# EAGLE board Base Station 1.7 (EAGLE 7.3.0)
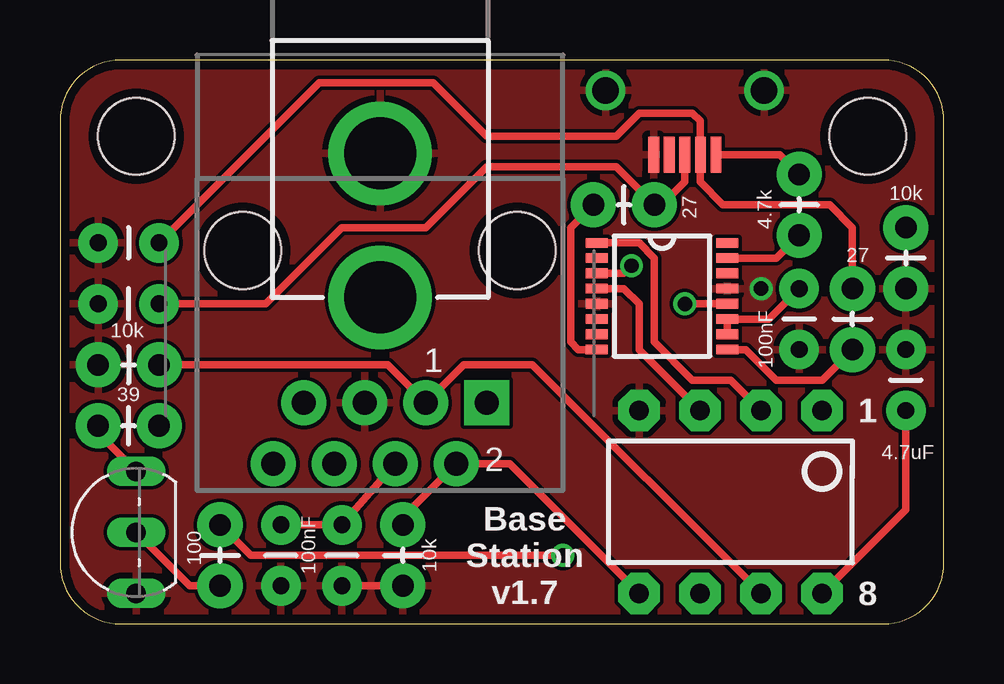
[diagram p0: board, top side]
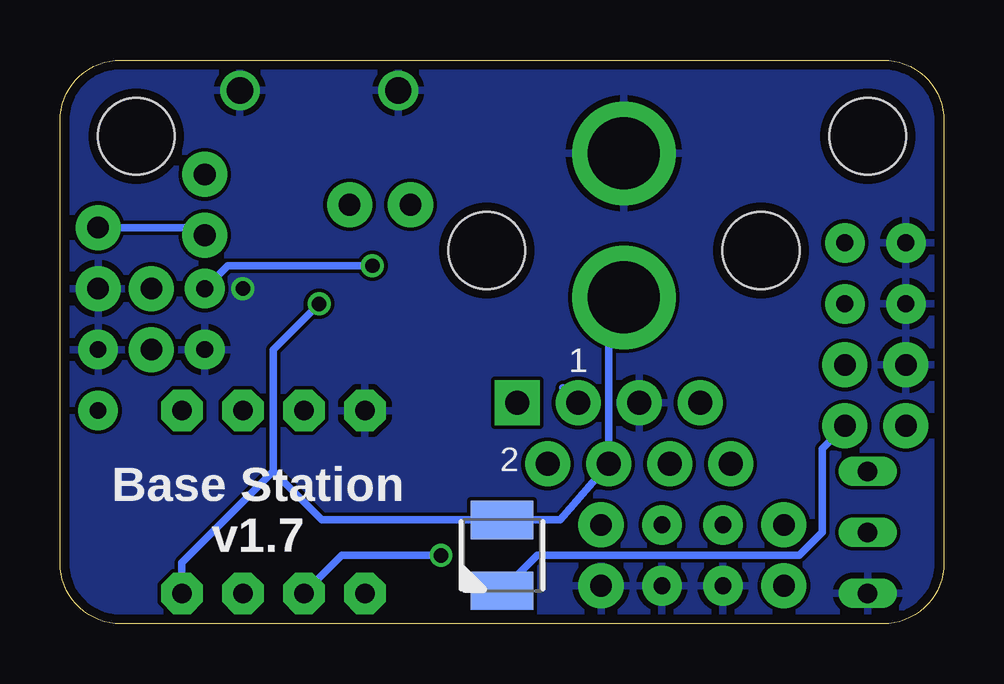
[diagram p1: board, bottom side, seen from below]

Size 36.83 x 23.5 mm. Coordinates in mm from the lower left corner, seen from the top.
Outline: 2.54,0 34.29,0 arc90 36.83,2.54 36.83,20.95 arc90 34.29,23.5 2.54,23.5 arc90 0,20.95 0,2.54 arc90 2.54,0
Copper layers (1*16): Top 0.0356mm / dielectric 1.5011mm / Bottom 0.0356mm
Design rules "LaenPCBOrder": minimum track width 6mil, minimum drill 13mil, track to track 6mil, track to pad 6mil, pad to pad 6mil, via to via 6mil, smd to smd 6mil, copper to edge 15mil, drill to drill 6mil, minimum pad ring 7mil, minimum via ring 7mil, stop-mask expansion 3mil, vias tented up to drill 0mil, thermal gap 10mil
Holes 3.2 mm at 3.17,20.32 33.66,20.32

## Footprints (pad centres in the part's own frame; a part is rotated, then mirrored left to right if it is on the bottom)
CAP-PTH-SMALL = drill 0.7 pad 1.651: 1 0,0; 2 2.54,0
SSOP16 = smd 0.914 x 0.406: 1 -2.718,2.223; 2 -2.718,1.587; 3 -2.718,0.953; 4 -2.718,0.318; 5 -2.718,-0.318; 6 -2.718,-0.953; 7 -2.718,-1.587; 8 -2.718,-2.223; 9 2.718,-2.223; 10 2.718,-1.587; 11 2.718,-0.953; 12 2.718,-0.318; 13 2.718,0.318; 14 2.718,0.953; 15 2.718,1.587; 16 2.718,2.223
POWER_JACK_PTH = drill 2.997 pad 4.318: GND 0,7.7; PWR 0,13.7
PLCC-2 = smd 2.6 x 1.6: ANODE 0,1.475; CATHODE 0,-1.475
TO92-EBC-OVAL = drill 0.813 long: B 0,-1.27; C 2.54,-1.27; E -2.54,-1.27
AXIAL-0.1 = drill 0.9 pad 1.88: P$1 0,0; P$2 2.54,0
DIP08 = drill 0.813 pad 1.727 octagon: 1 -3.81,-3.81; 2 -1.27,-3.81; 3 1.27,-3.81; 4 3.81,-3.81; 5 3.81,3.81; 6 1.27,3.81; 7 -1.27,3.81; 8 -3.81,3.81
USB_HORZ_MICRO_SMD = drill 1.1: G1 -3.3,0; G2 3.3,0 | smd 0.45 x 1.5: P1 -1.3,2.675; P2 -0.65,2.675; P3 0,2.675; P4 0.65,2.675; P5 1.3,2.675
RJ45-8 = drill 1 pad 1.88 square: 1 -4.445,6.35 | drill 1 pad 1.88: 2 -3.175,8.89; 3 -1.905,6.35; 4 -0.635,8.89; 5 0.635,6.35; 6 1.905,8.89; 7 3.175,6.35; 8 4.445,8.89 | hole 3.2: -5.715,0; 5.715,0

## Placement (x,y rotation side)
C1  47pF  [CAP-PTH-SMALL]  1.59,15.88 0 top
C2  47pF  [CAP-PTH-SMALL]  4.13,13.34 180 top
C5  100nF  [CAP-PTH-SMALL]  11.75,4.13 270 top
C6  100nF  [CAP-PTH-SMALL]  9.21,4.13 270 top
C7  100nF  [CAP-PTH-SMALL]  30.8,13.97 270 top
C8  4.7uF  [CAP-PTH-SMALL]  35.24,8.89 90 top
IC1  FT230XS  [SSOP16]  25.08,13.65 0 top
J1  POWER_JACKPTH  [POWER_JACK_PTH]  13.34,27.3 180 top
LED1  [PLCC-2]  18.41,2.86 0 bottom
Q1  2222A  [TO92-EBC-OVAL]  1.91,3.81 90 top
R1  39  [AXIAL-0.1]  1.59,8.26 0 top
R2  100  [AXIAL-0.1]  6.67,4.13 270 top
R3  10k  [AXIAL-0.1]  4.13,10.79 180 top
R5  10k  [AXIAL-0.1]  14.29,4.13 270 top
R13  27  [AXIAL-0.1]  22.23,17.46 0 top
R14  4.7k  [AXIAL-0.1]  30.8,16.19 90 top
R15  10k  [AXIAL-0.1]  35.24,13.97 90 top
R16  27  [AXIAL-0.1]  33.02,13.97 270 top
U2  TINY85-20-DIP  [DIP08]  27.94,5.08 180 top
U$1  USB_SOCKET_MICRO_VERTHORIZONTAL  [USB_HORZ_MICRO_SMD]  26.04,22.23 180 top
U$3  RJ45  [RJ45-8]  13.34,15.56 180 top

## Library data of the parts
C1 C2 C5-C8 = SparkFun-Capacitors
IC1 = ftdichip
J1 = Andy-library; PROD_ID: PRT-00119
LED1 Q1 U$1 U$3 = Andy-library
R1-R3 R5 R13-R16 = SparkFun-Resistors
U2 = SparkFun-DigitalIC; PROD_ID: IC-09445

## Nets
3.3VDC: U$3.7
5VDC: C5.1 C6.1 C8.1 IC1.12 J1.PWR LED1.ANODE U2.8 U$3.4
12VDC: U$3.6
85_RX: IC1.1 U2.2
85_TX: IC1.4 U2.3
GND: C1.1 C2.2 C5.2 C6.2 C7.2 C8.2 IC1.5 IC1.13 J1.GND Q1.E R3.P$2 R5.P$2 R15.P$1 U2.4 U$1.G1 U$1.G2 U$1.P5 U$3.5
IN1: U$3.1
IN2: U$3.8
N$1: Q1.C R1.P$1
N$2: LED1.CATHODE R1.P$2
N$4: R2.P$1 U2.6
N$5: Q1.B R2.P$2
N$9: C1.2 R16.P$1 U$1.P2
N$10: C2.1 R13.P$2 U$1.P3
N$12: R14.P$2 U$1.P1
N$13: IC1.9 R16.P$2
N$16: C7.1 IC1.3 IC1.10 IC1.11
N$17: IC1.15 R14.P$1 R15.P$2
N$18: IC1.8 R13.P$1
OUT1: R3.P$1 U2.7 U$3.3
OUT2: R5.P$1 U2.5 U$3.2

## Tracks (layer width: path | path; a pad name or v marks a point on that pad's centre or on a via)
5VDC  (via drill 0.6)
  Top 0.305: IC1.12 v26.04,13.34 | U$3.4 C5.1 C6.1 | C8.1 35.24,4.76 U2.8
  Bottom 0.305: U2.8 31.75,2.54 27.94,6.35 | 27.94,6.35 25.92,4.33 LED1.ANODE 15.99,4.33 U$3.4 13.97,12.97 J1.PWR | 27.94,6.35 27.94,11.43 v26.04,13.34
85_RX
  Top 0.305: IC1.1 24.13,15.88 24.77,15.24 24.77,11.75 26.35,10.16 27.94,10.16 U2.2
85_TX
  Top 0.305: IC1.4 23.5,13.97 24.13,13.34 24.13,11.43 U2.3
GND  (via drill 0.6)
  Top 0.305: R5.P$2 C5.2
  other vias: 29.21,13.97
  pour Bottom: -1.27,24.13 39.37,24.13 39.37,-1.27 -1.27,-1.27
  pour Top: -1.27,24.13 39.37,24.13 39.37,-1.27 -1.27,-1.27
N$1
  Top 0.305: Q1.C 1.59,7.94 R1.P$1
N$2
  Bottom 0.305: LED1.CATHODE 16.94,2.86 6.03,2.86 5.08,3.81 5.08,7.3 R1.P$2
N$4  (via drill 0.6)
  Top 0.305: R2.P$1 7.94,2.86 v20.95,2.86
  Bottom 0.305: v20.95,2.86 25.08,2.86 U2.6
N$5
  Top 0.305: Q1.B 5.4,1.59 R2.P$2
N$9
  Top 0.305: R16.P$1 33.02,16.51 32.07,17.46 27.62,17.46 26.67,18.41 26.67,19.54 U$1.P2 26.67,19.57 26.67,20.95 26.35,21.27 24.13,21.27 23.18,20.32 17.78,20.32 15.56,22.54 10.79,22.54 C1.2
N$10
  Top 0.305: U$1.P3 26.04,18.41 25.08,17.46 R13.P$2 23.18,19.05 17.78,19.05 15.24,16.51 11.75,16.51 8.57,13.34 C2.1
N$12
  Top 0.305: U$1.P1 29.98,19.55 R14.P$2
N$13
  Top 0.305: IC1.9 28.57,11.43 29.84,10.16 31.75,10.16 R16.P$2
N$16  (via drill 0.6)
  Top 0.305: IC1.10 IC1.11 29.53,12.7 C7.1 | IC1.3 23.5,14.61 v23.81,14.92
  Bottom 0.305: v23.81,14.92 29.84,14.92 C7.1
N$17
  Top 0.305: IC1.15 29.84,15.24 R14.P$1
  Bottom 0.305: R14.P$1 31.11,16.51 R15.P$2
N$18
  Top 0.305: IC1.8 21.59,11.43 21.27,11.75 21.27,16.51 R13.P$1
OUT1
  Top 0.305: U2.7 19.68,10.79 16.83,10.79 U$3.3 13.65,10.79 R3.P$1
  Bottom 0.305: 15.88,9.84 U$3.3
OUT2
  Top 0.305: U2.5 18.73,6.67 U$3.2 14.29,4.45 R5.P$1

## Text on the board
tNames: 1 | 1 | 2 | Base / Station / v1.7 | 8
bNames: 1 | 2 | Base Station / v1.7